# Altium PCB Mach in giua ben trai.PcbDoc
Units mm, origin at the board's own origin, x right, y up, seen from the top; angles counter-clockwise.
Board outline 128.65 x 91.19 mm, 2 copper layers (Top Layer, Bottom Layer); 61 components, 49 nets, 167 pads, 49 vias.
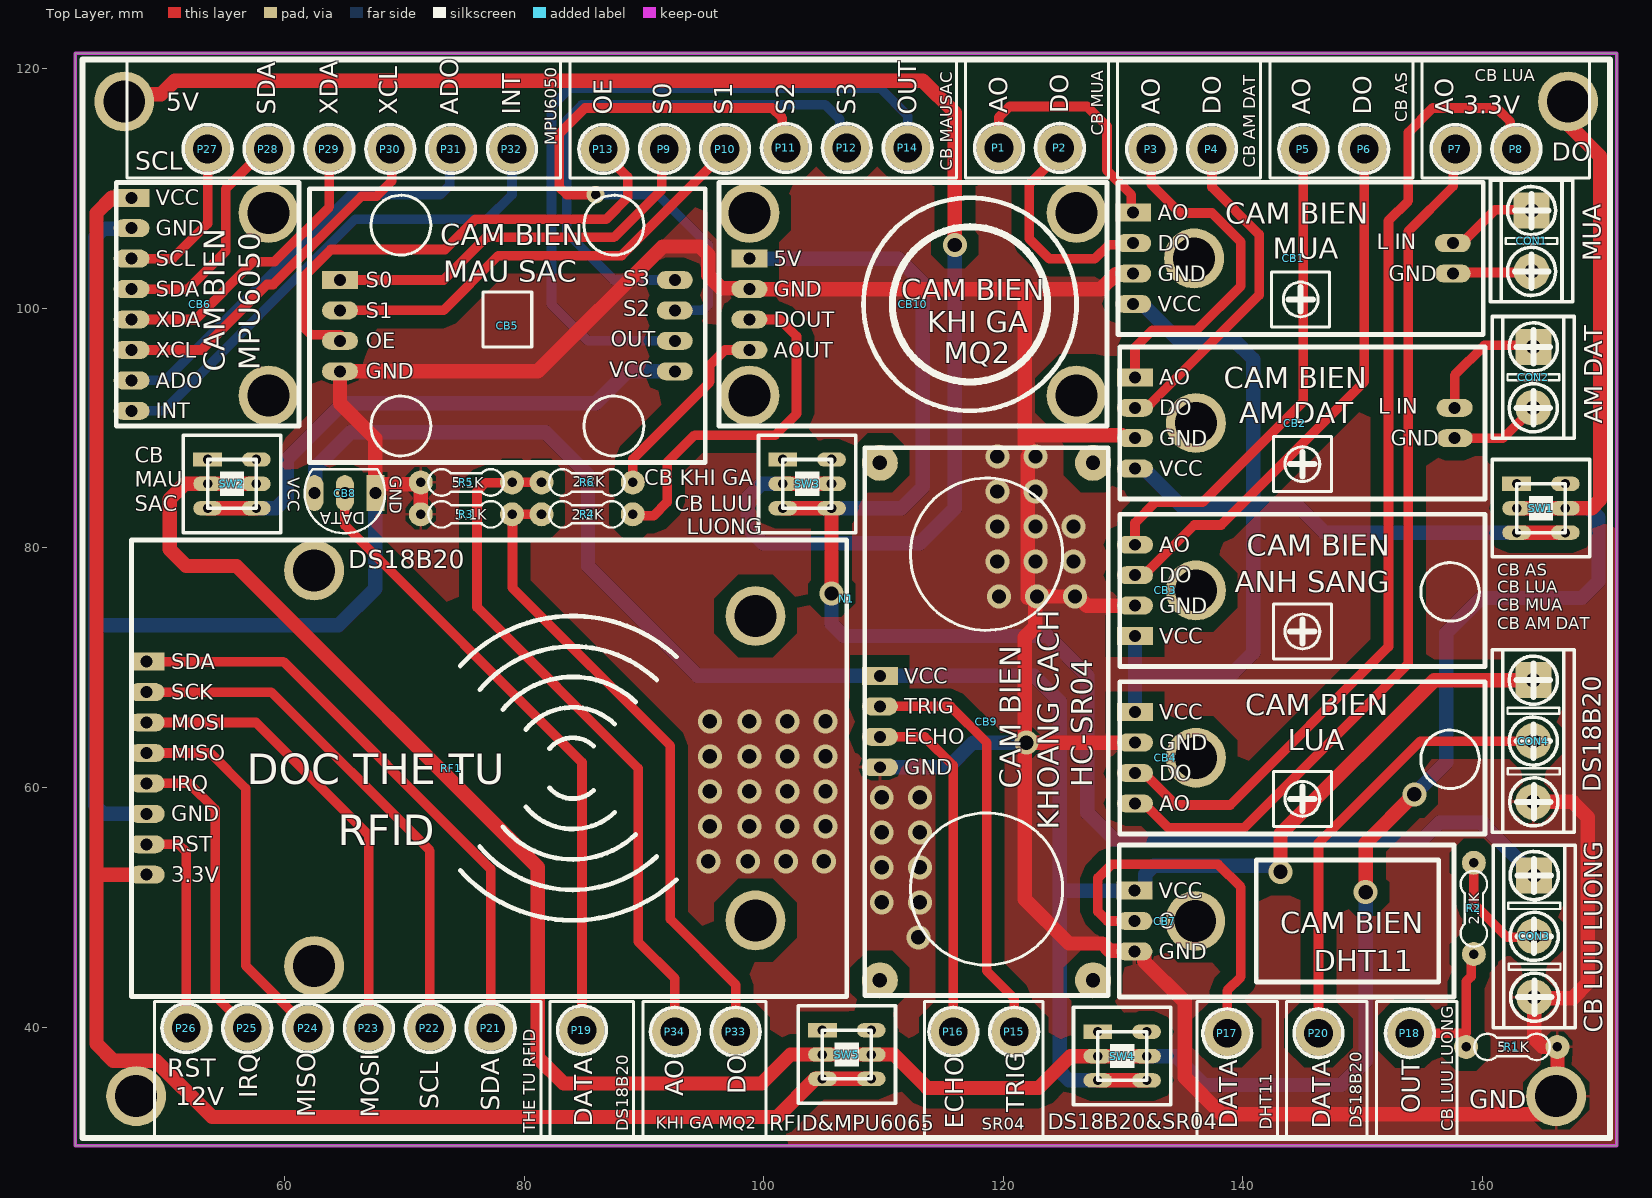
[diagram p0: Top Layer view]
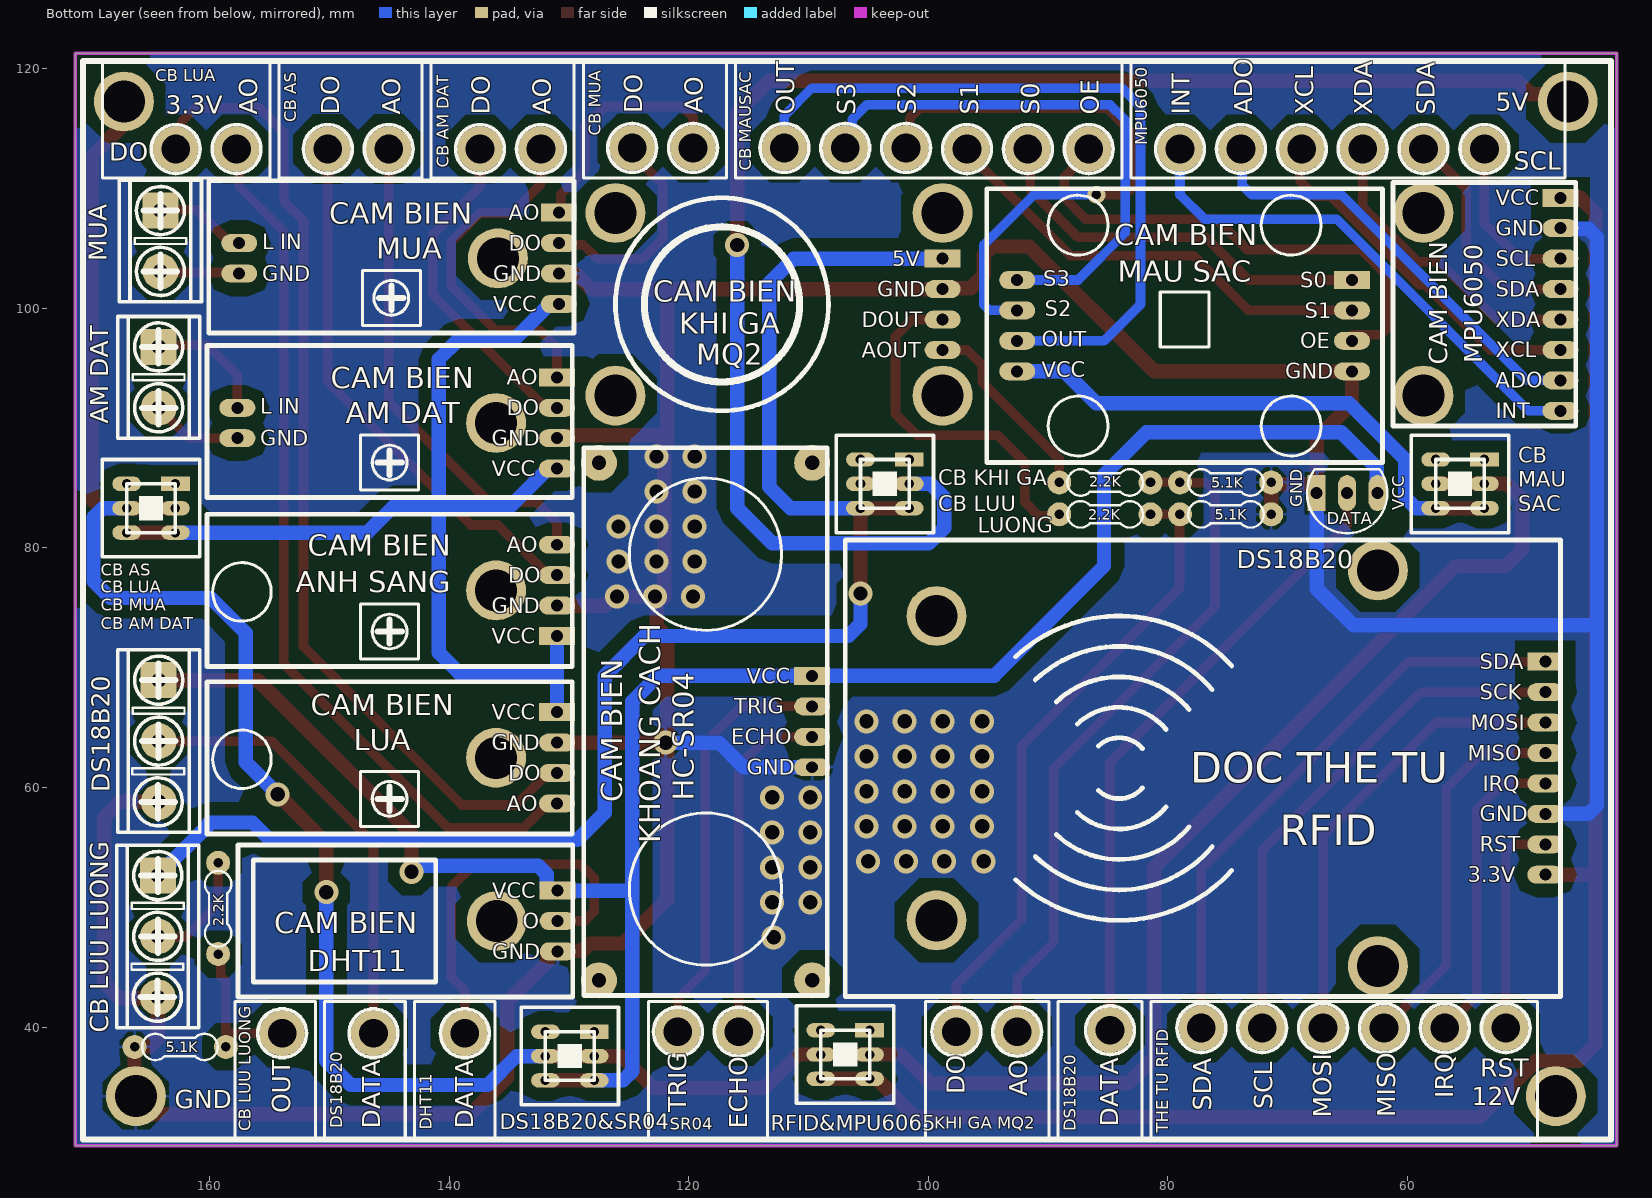
[diagram p1: Bottom Layer view, seen from below]

## Layer stack, top to bottom
Top Solder: solder mask 0.0102, Solder Resist, Dk 3.5
Top Layer: signal copper 0.0356
Dielectric 1: dielectric 0.32, FR-4, Dk 4.8
Bottom Layer: signal copper 0.0356
Bottom Solder: solder mask 0.0102, Solder Resist, Dk 3.5

## Board outline
171.196,121.285 42.545,121.285 42.545,30.099 171.196,30.099

## Design rules (kind name [scope] priority, off if disabled: settings)
Clearance [All] p1: gap=1 ignorepadtopadclearanceinfootprint=FALSE
PolygonConnect [All] p1: connectstyle=Relief reliefconductorwidth=0.254 reliefentries=4 polygonreliefangle="90 Angle" airgapwidth=0.254
RoutingVias [All] p1: holewidth=0.8 width=1.5 viastyle="Through Hole" minholewidth=0.5 minwidth=1 maxholewidth=1.2 maxwidth=2
SolderMaskExpansion [All] p1: expansion=0.102 istentingtop=FALSE
Width [All] p1: maxlimit=1.2 minlimit=0.5 preferedwidth=0.8
30 further rules are at their usual default settings.

## Components (designator, comment, footprint, x,y, rotation, side; value= is the part's Value field where it differs from the comment)
CB1 "CB_MUA" CB_MUA 144.684,103.786 r0 top
CB2 "CB_DAT" CB_MUA 144.832,90.043 r0 top
CB3 "CB ANH SANG" "CB ANH SANG" 144.719,76.599 r0 top
CB4 "CB_LUA" CB_LUA 145.086,62.484 r0 top
CB5 "CB_MAUSAC" CB_MAUSAC 78.613,99.187 r0 top
CB6 "CB_MPU6050" CB_MPU6050 53.594,100.33 r0 top
CB7 "CB_DHT11" CB_DHT11 144.274,48.61 r0 top
CB8 "DS18B20" DS18B20 65.047,84.577 r270 top
CB9 "CB_SR04" CB_SR04 118.465,65.125 r0 top
CB10 "MQ2" MQ2 117.221,100.584 r0 top
CON1 "CON2" CON2 164.084,105.614 r0 top
CON2 "CON2" CON2 164.233,94.234 r0 top
CON3 "CB_LUULUONG" CON3 164.302,47.454 r0 top
CON4 "DS18B20_NUOC" CON3 164.233,63.754 r0 top
N1 "NGUON_2" NGUON_2 108.585,77.343 r0 top
P1 "PIN" PIN1 119.634,113.384 r180 top
P2 "PIN" PIN1 124.714,113.384 r180 top
P3 "PIN" PIN1 132.334,113.284 r180 top
P4 "PIN" PIN1 137.414,113.284 r180 top
P5 "PIN" PIN1 145.034,113.284 r180 top
P6 "PIN" PIN1 150.114,113.284 r180 top
P7 "PIN" PIN1 157.734,113.284 r180 top
P8 "PIN" PIN1 162.814,113.284 r180 top
P9 "PIN" PIN1 91.694,113.284 r180 top
P10 "PIN" PIN1 96.774,113.284 r180 top
P11 "PIN" PIN1 101.854,113.384 r180 top
P12 "PIN" PIN1 106.934,113.384 r180 top
P13 "PIN" PIN1 86.614,113.284 r180 top
P14 "PIN" PIN1 112.014,113.384 r180 top
P15 "PIN" PIN1 120.904,39.624 r180 top
P16 "PIN" PIN1 115.824,39.624 r180 top
P17 "PIN" PIN1 138.684,39.497 r180 top
P18 "PIN" PIN1 153.924,39.497 r180 top
P19 "PIN" PIN1 84.836,39.751 r180 top
P20 "PIN" PIN1 146.304,39.497 r180 top
P21 "PIN" PIN1 77.216,39.927 r180 top
P22 "PIN" PIN1 72.136,39.927 r180 top
P23 "PIN" PIN1 67.056,39.927 r180 top
P24 "PIN" PIN1 61.976,39.927 r180 top
P25 "PIN" PIN1 56.896,39.927 r180 top
P26 "PIN" PIN1 51.816,39.927 r180 top
P27 "PIN" PIN1 53.594,113.284 r180 top
P28 "PIN" PIN1 58.674,113.284 r180 top
P29 "PIN" PIN1 63.754,113.284 r180 top
P30 "PIN" PIN1 68.834,113.284 r180 top
P31 "PIN" PIN1 73.914,113.284 r180 top
P32 "PIN" PIN1 78.994,113.284 r180 top
P33 "PIN" PIN1 97.663,39.624 r180 top
P34 "PIN" PIN1 92.583,39.624 r180 top
R1 "5.1K" DIENTRO 162.56,38.354 r270 top
R2 "2.2K" DIENTRO 159.266,49.784 r180 top
R3 "5.1K" DIENTRO 75.064,82.804 r90 top
R4 "2.2K" DIENTRO 85.142,82.804 r90 top
R5 "5.1K" DIENTRO 75.064,85.464 r90 top
R6 "2.2K" DIENTRO 85.142,85.464 r90 top
RF1 "THE TU RFID" "THE TU RFID" 76.962,61.363 r0 top
SW1 "CONGTAC6CHAN" CONGTAC6CHAN 164.868,83.312 r0 top
SW2 "CONGTAC6CHAN" CONGTAC6CHAN 55.626,85.344 r0 top
SW3 "CONGTAC6CHAN" CONGTAC6CHAN 103.632,85.344 r0 top
SW4 "CONGTAC6CHAN" CONGTAC6CHAN 129.921,37.592 r0 top
SW5 "CONGTAC6CHAN" CONGTAC6CHAN 106.934,37.719 r0 top

## Footprints (in the part's own frame and the unit in brackets; to place one, negate y for a bottom-side part, rotate by r counter-clockwise, add the part's x,y. Pads: shape width x height; smd on the part's side, far side on the other; paste and mask are expansions set on the pad)
"CB ANH SANG" [mm]
  round 5 hole 3.5: 0(-8.649,-0.145)
  rect 3x1.5 hole 1: 1(-13.729,-3.955)
  oval 3x1.5 hole 1: 2(-13.729,-1.415) 3(-13.729,1.125) 4(-13.729,3.665)
  silkscreen extent -15,-6.5 15.48,6.2
CB_DHT11 [mm]
  round 5 hole 3.5: 0(-8.255,0.254)
  rect 3x1.5 hole 1: 1(-13.335,2.794)
  oval 3x1.5 hole 1: 2(-13.335,0.254) 3(-13.335,-2.286)
  silkscreen extent -14.6,-6.1 13.33,6.6
CB_LUA [mm]
  round 5 hole 3.5: 0(-9.017,0)
  rect 3x1.5 hole 1: 1(-14.097,3.81)
  oval 3x1.5 hole 1: 2(-14.097,1.27) 3(-14.097,-1.27) 4(-14.097,-3.81)
  silkscreen extent -15.37,-6.35 15.11,6.35
CB_MAUSAC [mm]
  rect 3x1.5 hole 1: 1(-13.97,3.175)
  oval 3x1.5 hole 1: 2(-13.97,0.635) 3(-13.97,-1.905) 4(-13.97,-4.445) 5(13.97,-4.445) 6(13.97,-1.905) 7(13.97,0.635) 8(13.97,3.175)
  silkscreen extent -16.51,-12.06 16.51,10.79
CB_MPU6050 [mm]
  round 5 hole 3.5: 0(5.08,-7.62) 0(5.08,7.62)
  rect 3x1.5 hole 1: 1(-6.35,8.89)
  oval 3x1.5 hole 1: 2(-6.35,6.35) 3(-6.35,3.81) 4(-6.35,1.27) 5(-6.35,-1.27) 6(-6.35,-3.81) 7(-6.35,-6.35) 8(-6.35,-8.89)
  silkscreen extent -7.62,-10.16 7.62,10.16
CB_MUA [mm]
  round 5 hole 3.5: 0(-8.763,0.381)
  rect 3x1.5 hole 1: 1(-13.843,4.191)
  oval 3x1.5 hole 1: 2(-13.843,1.651) 3(-13.843,-0.889) 4(-13.843,-3.429) 5(12.827,1.651) 6(12.827,-0.889)
  silkscreen extent -15.11,-5.97 15.37,6.73
CB_SR04 [mm]
  round 3 hole 1.2: 0(-8.763,-21.209) 0(-8.763,21.971) 0(9.017,-21.209) 0(9.017,21.971)
  rect 3x1.5 hole 1: 1(-8.763,4.191)
  oval 3x1.5 hole 1: 2(-8.763,1.651) 3(-8.763,-0.889) 4(-8.763,-3.429)
  silkscreen extent -10.03,-22.48 10.29,23.24
CON2 [mm]
  rect 3x3 hole 1.2: 1(0,2.54)
  round 3 hole 1.2: 2(0,-2.54)
  silkscreen extent -3.43,-5.08 3.43,5.08
CON3 [mm]
  rect 3x3 hole 1.2: 1(0,5.207)
  round 3 hole 1.2: 2(0,0.127) 3(0,-4.953)
  silkscreen extent -3.43,-7.49 3.43,7.75
CONGTAC6CHAN [mm]
  rect 2.4x1.2 hole 0.8: 1(-2.032,2.032)
  oval 2.4x1.2 hole 0.8: 2(-2.032,0) 3(-2.032,-2.032) 4(2.032,2.032) 5(2.032,0) 6(2.032,-2.032)
  silkscreen extent -4.06,-4.06 4.06,4.06
DIENTRO [mm]
  round 2 hole 0.8: 1(0,3.683) 2(0,-3.937)
  silkscreen extent -1.1,-3.26 1.1,3.05
DS18B20 [mm]
  rect 3x1.5 hole 1: 1(0,2.54)
  oval 3x1.5 hole 1: 2(0,0) 3(0,-2.54)
  silkscreen extent -1.99,-3.35 3.35,3.35
MQ2 [mm]
  round 5 hole 3.5: 0(-18.415,-7.874) 0(-18.415,7.366) 0(8.89,-7.874) 0(8.89,7.366)
  rect 3x1.5 hole 1: 1(-18.415,3.556)
  oval 3x1.5 hole 1: 2(-18.415,1.016) 3(-18.415,-1.524) 4(-18.415,-4.064)
  silkscreen extent -20.95,-10.41 11.43,9.91
NGUON_2 [mm]
  round 5 hole 3.5: 1(-61.95,39.91) 2(58.55,39.91) 3(-60.95,-43.09) 4(57.55,-43.09)
  silkscreen extent -65.45,-46.59 62.05,43.41
PIN1 [mm]
  round 3.8 hole 2.4: 1(0,0)
  silkscreen extent -2.03,-2.03 2.03,2.03
"THE TU RFID" [mm]
  round 5 hole 3.5: 0(-14.478,-16.256) 0(-14.478,16.764) 0(22.352,-12.446) 0(22.352,12.954)
  rect 3x1.5 hole 1: 1(-28.448,9.144)
  oval 3x1.5 hole 1: 2(-28.448,6.604) 3(-28.448,4.064) 4(-28.448,1.524) 5(-28.448,-1.016) 6(-28.448,-3.556) 7(-28.448,-6.096) 8(-28.448,-8.636)
  silkscreen extent -29.72,-18.8 29.97,19.3

## Part data
CON3 CON4: library part CON3
R1 R2 R3 R4 R5 R6: library part DIENTRO

## Via types
v1: diameter 2, hole 1.2, Top Layer to Bottom Layer, tented both sides, 48 vias
v2: diameter 1.5, hole 0.8, Top Layer to Bottom Layer, tented both sides, 1 vias

## Nets (pads, with @x,y where several pads share a name; then routed paths per layer and width w, separated by ;. In a path a pad name is that pad's centre, name@x,y a point inside that pad or via, vN(x,y) a via of type N, cw(c..) or ccw(c..) an arc to the next point about the centre after c; other vN are vias at no path point)
1AO: CB1.1 P1.1 | length 20.8
  Top Layer w0.8: P1.1 119.634,115.951 120.523,116.84 127,116.84 128.651,115.189 128.651,111.506 130.683,109.474 130.683,108.135 CB1.1
1DO: CB1.2 P2.1 | length 18.5
  Top Layer w0.8: P2.1 124.714,112.903 122.174,110.363 122.174,105.791 123.825,104.14 127.635,104.14 128.798,105.303 130.707,105.303 CB1.2
1SCL: P22.1 RF1.2 | length 43.9
  Top Layer w0.8: RF1.2 58.906,67.967 72.136,54.737 P22.1
1SDA: P21.1 RF1.1 | length 49.2
  Top Layer w0.8: RF1.1 59.922,70.507 77.216,53.213 P21.1
2AO: CB2.1 P3.1 | length 29.5
  Top Layer w0.8: CB2.1 130.989,96.722 132.439,98.171 136.144,98.171 139.827,101.854 139.827,105.537 137.414,107.95 134.747,107.95 132.334,110.363 P3.1
2DO: CB2.2 P4.1 | length 28.1
  Top Layer w0.8: CB2.2 131.929,91.694 132.279,92.044 132.303,92.044 141.351,101.092 141.351,106.172 137.414,110.109 P4.1
2SCL: CB6.3 P27.1 | length 13.8
  Top Layer w0.8: CB6.3 50.673,104.14 53.594,107.061 P27.1
2SDA: CB6.4 P28.1 | length 19.3
  Top Layer w0.8: CB6.4 51.943,101.6 55.118,104.775 55.118,109.982 58.42,113.284 P28.1
3.3V: N1.2 SW1.2 SW1.5 SW2.2 SW2.5 SW4.2 SW4.5 SW5.2 SW5.5 | length 246
  Top Layer w1.2: SW2.5 SW2.2 51.689,85.344 50.419,84.074 50.419,79.883 51.816,78.486 56.007,78.486 81.153,53.34 81.153,37.465 83.312,35.306 99.822,35.306 102.235,37.719 SW5.2 SW5.5 110.871,37.719 113.665,34.925 122.936,34.925 125.603,37.592 SW4.2 SW4.5 ; v1(150.241,51.267) 150.241,55.372 v1(154.305,59.436) ; SW1.2 169.096,83.312 169.799,84.015 169.799,112.693 167.262,115.23 N1.2@167.262,115.729
  Bottom Layer w1.2: SW4.5 134.366,37.592 136.779,35.179 148.209,35.179 150.241,37.211 v1(150.241,51.267) ; v1(154.305,59.436) 156.972,62.103 156.972,72.898 159.893,75.819 168.275,75.819 169.672,77.216 169.672,82.55 168.91,83.312 SW1.5
3.3V1: CB1.4 CB2.4 CB3.1 CB4.1 SW1.3 SW1.6 | length 91.5
  Top Layer w1.2: SW1.3 SW1.6
  Bottom Layer w1.2: CB1.4 131.591,100.357 134.539,97.409 139.192,97.409 140.843,95.758 140.843,83.502 ; CB4.1 130.989,69.596 ; CB3.1 130.989,69.596 ; CB2.4 131.739,86.614 134.914,83.439 140.779,83.439 140.843,83.502 ; SW1.3 146.812,81.28 144.589,83.502 140.843,83.502 ; 130.989,69.596 139.192,69.596 140.843,71.247 140.843,83.502
3.3V2: CB5.5 SW2.3 SW2.6 | length 45.6
  Top Layer w1.2: SW2.3 SW2.6
  Bottom Layer w1.2: SW2.6 59.309,83.312 60.198,84.201 60.198,87.376 64.897,92.075 85.979,92.075 88.646,94.742 CB5.5
3.3V3: CB7.1 CB8.3 CB9.1 CON4.1 SW4.3 SW4.6 | length 167.1
  Top Layer w1.2: SW4.3 SW4.6 ; v1@143.129,53.34 143.129,56.134 155.956,68.961 CON4.1
  Bottom Layer w1.2: CB8.3 62.565,84.634 62.565,86.695 65.532,89.662 81.788,89.662 85.344,86.106 85.344,78.486 94.514,69.316 CB9.1 122.581,69.316 124.714,67.183 124.714,51.404 ; SW4.3 125.476,35.56 124.714,36.322 124.714,51.404 ; v1(143.129,52.959) 142.913,52.959 142.405,53.467 132.542,53.467 131.839,52.764 131.839,51.554 131.689,51.404 124.714,51.404
3.3V4: CB6.1 RF1.8 SW5.3 SW5.6 | length 145.5
  Top Layer w1.2: CB6.1 45.593,109.22 44.323,107.95 44.323,52.727 ; RF1.8 44.323,52.727 ; SW5.6 SW5.3 104.302,35.687 101.127,32.512 53.975,32.512 49.276,37.211 45.72,37.211 44.323,38.608 44.323,52.727
3AO: CB3.4 P5.1 | length 41.1
  Top Layer w0.8: CB3.4 130.989,82.094 132.715,83.82 136.652,83.82 145.034,92.202 P5.1
3DO: CB3.3 P6.1 | length 45.2
  Top Layer w0.8: CB3.3 131.739,77.724 135.93,81.915 138.176,81.915 150.114,93.853 P6.1
4AO: CB4.4 P7.1 | length 73.9
  Top Layer w0.8: CB4.4 131.739,58.674 133.771,56.642 140.081,56.642 153.797,70.358 153.797,106.436 157.545,110.184 157.545,113.095 P7.1
4DO: CB4.3 P8.1 | length 83.7
  Top Layer w0.8: CB4.3 131.739,61.214 134.406,58.547 138.938,58.547 152.146,71.755 152.146,107.315 153.797,108.966 153.797,114.681 155.829,116.713 161.163,116.713 162.311,115.565 162.311,113.787 P8.1
5V: N1.1 SW3.2 SW3.5 | length 134.4
  Top Layer w1.2: N1.1@46.762,115.729 47.573,115.729 47.573,117.045 48.39,117.862 49.707,117.862 50.843,118.999 113.284,118.999 115.951,116.332 v1(115.951,105.283) ; SW3.2 SW3.5
  Bottom Layer w1.2: SW3.2 99.822,85.344 98.679,84.201 98.679,81.661 99.949,80.391 113.03,80.391 115.951,83.312 v1(115.951,105.283)
5V1: CB10.1 CON3.1 SW3.3 SW3.6 | length 129.7
  Top Layer w1.2: SW3.3 SW3.6 v1(105.664,76.2)
  Bottom Layer w1.2: CB10.1 111.252,104.14 113.284,102.108 113.284,85.09 111.506,83.312 SW3.6 ; v1(105.664,76.2) 105.664,73.66 106.68,72.644 123.698,72.644 127,69.342 127,57.912 129.286,55.626 154.94,55.626 156.396,57.082 160.02,57.082 160.02,56.943 CON3.1
ADO: CB6.7 P31.1 | length 36.4
  Bottom Layer w0.8: CB6.7 50.038,93.98 65.532,109.474 73.025,109.474 73.787,110.236 73.787,113.157 P31.1
AOUT: CB10.4 R6.2 | length 16.3
  Top Layer w0.8: R6.2 89.079,87.428 95.504,93.853 95.504,95.25 96.774,96.52 CB10.4
AOUT1: P34.1 R5.2 R6.1 | length 57.6
  Top Layer w0.8: R6.1 R5.2 78.975,85.437 76.801,85.437 76.073,84.709 76.073,75.057 89.535,61.595 89.535,47.117 92.583,44.069 P34.1
DATA1: CB8.2 P19.1 | length 53
  Top Layer w0.8: CB8.2 65.047,81.892 84.836,62.103 P19.1
DATA2: CON4.2 P20.1 | length 37.3
  Top Layer w0.8: P20.1 146.304,55.372 154.813,63.881 CON4.2
DOUT: CB10.3 R4.2 | length 30.2
  Top Layer w0.8: R4.2 89.206,82.677 90.805,82.677 91.948,83.82 91.948,87.122 94.234,89.408 100.965,89.408 102.743,91.186 102.743,97.663 101.346,99.06 CB10.3
DOUT1: P33.1 R3.2 R4.1 | length 53.4
  Top Layer w0.8: R4.1 R3.2 79.035,82.77 79.035,76.667 92.202,63.5 92.202,49.022 97.663,43.561 P33.1
ECHO: CB9.3 P16.1 | length 29.3
  Top Layer w0.8: CB9.3 113.437,64.236 115.824,61.849 P16.1
GND: CB1.3 CB2.3 CB3.2 CB4.2 CB5.4 CB6.2 CB7.3 CB8.1 CB9.4 CB10.2 CON3.3 CON4.3 N1.4 R1.1 R3.1 R5.1 RF1.6 | length 363
  Top Layer w1.2: CB8.1 CB8.1@67.587,85.161 ; R3.1 R5.1 71.228,85.311 67.737,85.311 CB8.1@67.587,85.161 ; v1@122.047,75.819 v1@122.047,87.63 ; v1(122.682,87.63) 122.682,87.846 121.793,88.735 121.793,89.408 ; v1@122.809,75.692 123.063,75.946 125.73,75.946 v1@125.984,75.692 ; v1(122.809,75.946) 122.656,75.793 122.656,73.409 121.793,72.546 v1@121.793,63.627 ; v1(125.984,75.946) 126.2,75.946 126.962,75.184 CB3.2 ; CB1.3 130.783,102.839 129.382,102.839 128.143,101.6 121.793,101.6 ; CB4.2 v1(121.92,63.754) v1@121.793,63.627 ; CB2.3 130.158,89.154 129.904,89.408 121.793,89.408 ; CON4.3 167.513,58.801 168.783,57.531 168.783,43.688 167.513,42.418 164.385,42.418 CON3.3 164.302,39.057 165.005,38.354 R1.1 166.252,38.345 166.252,32.738 166.262,32.729 138.213,32.729 135.128,35.814 135.128,42.136 131.747,45.517 131.747,46.186 131.608,46.324 CB7.3 130.882,46.382 128.878,46.382 128.27,46.99 125.476,46.99 121.793,50.673 v1@121.793,63.627 ; CB8.1@67.587,85.161 67.587,89.131 64.643,92.075 CB5.4 81.153,94.742 91.567,105.156 94.674,105.156 95.377,104.453 95.377,102.743 96.463,101.657 98.749,101.657 CB10.2 121.793,101.6 ; 121.793,89.408 121.793,101.6
  Bottom Layer w1.2: CB6.2 47.187,106.623 44.899,106.623 44.196,105.92 44.196,73.279 ; RF1.6 44.899,57.807 44.196,58.51 44.196,73.279 ; CB8.1 67.587,76.604 64.516,73.533 44.45,73.533 44.196,73.279 ; CB9.4 115.417,61.696 117.475,63.754 v1(121.92,63.754)
  other v1: 112.903,47.498 109.855,50.419 113.03,50.419 109.855,53.34 113.03,53.34 95.377,53.848 98.679,53.848 101.854,53.848 105.029,53.848 109.855,56.261 113.03,56.261 95.504,56.769 98.806,56.769 101.981,56.769 105.156,56.769 109.855,59.182 113.03,59.182 95.504,59.69 98.806,59.69 101.981,59.69 105.156,59.69 95.504,62.611 98.806,62.611 101.981,62.611 105.156,62.611 95.504,65.532 98.806,65.532 101.981,65.532 105.156,65.532 119.634,75.946 119.507,78.867 122.682,78.867 125.857,78.867 119.507,81.788 122.682,81.788 125.857,81.788 119.507,84.709 122.682,84.709 119.507,87.63
IN: CB6.8 P32.1 | length 43
  Bottom Layer w0.8: CB6.8 49.911,91.44 65.913,107.442 76.962,107.442 78.994,109.474 P32.1
IRQ: P25.1 RF1.5 | length 26
  Top Layer w0.8: RF1.5 52.048,60.347 54.229,58.166 54.229,42.594 P25.1
MISO: P24.1 RF1.4 | length 31.6
  Top Layer w0.8: RF1.4 53.826,62.887 56.769,59.944 56.769,45.134 P24.1
MOSI: P23.1 RF1.3 | length 38.5
  Top Layer w0.8: RF1.3 57.636,65.427 67.056,56.007 P23.1
NetCB1_5: CB1.5 CON1.1 | length 7.7
  Top Layer w0.8: CB1.5 158.261,105.437 161.028,108.204 164.034,108.204 CON1.1
NetCB1_6: CB1.6 CON1.2 | length 6.6
  Top Layer w0.8: CB1.6 157.599,102.985 163.995,102.985 CON1.2
NetCB2_5: CB2.5 CON2.1 | length 10.4
  Top Layer w0.8: CB2.5 157.659,94.413 160.147,96.901 164.106,96.901 CON2.1
NetCB2_6: CB2.6 CON2.2 | length 7.6
  Top Layer w0.8: CB2.6 161.693,89.154 CON2.2
OE: CB5.3 P13.1 | length 42.3
  Top Layer w0.8: CB5.3@64.643,97.79 62.23,97.79 61.468,98.552 61.468,102.489 63.881,104.902 73.406,104.902 75.946,107.442 86.868,107.442 88.646,109.22 88.646,110.97 86.614,113.002 P13.1
OUT: CON3.2 R2.2 | length 9.7
  Top Layer w0.8: R2.2 159.266,50.284 162.052,47.498 164.219,47.498 CON3.2
OUT1: CB5.6 P14.1 | length 62
  Bottom Layer w0.8: CB5.6 85.344,97.282 82.296,100.33 82.296,116.84 83.82,118.364 109.728,118.364 112.014,116.078 P14.1
OUT2: CB7.2 P17.1 | length 32
  Top Layer w0.8: CB7.2 128.682,48.864 127.889,49.657 127.889,52.451 129.032,53.594 137.922,53.594 139.827,51.689 139.827,44.196 138.684,43.053 P17.1
OUT4: P18.1 R1.2 R2.1 | length 11.6
  Top Layer w0.8: P18.1 158.623,39.497 158.623,43.815 159.037,44.229 159.037,45.871 R2.1
RESET: P26.1 RF1.7 | length 18.3
  Top Layer w0.8: RF1.7 51.159,55.267 51.816,54.61 P26.1
S0: CB5.1 P9.1 | length 33.4
  Top Layer w0.8: CB5.1 73.279,102.362 76.835,105.918 87.503,105.918 91.508,109.923 91.508,113.098 P9.1
S1: CB5.2 P10.1 | length 37.9
  Top Layer w0.8: CB5.2 73.279,99.822 77.851,104.394 88.138,104.394 96.774,113.03 P10.1
S2: CB5.7 P11.1 | length 49.3
  Top Layer w0.8: v2(85.979,109.474) 83.566,109.474 82.931,110.109 82.931,114.554 85.09,116.713 100.711,116.713 101.555,115.869 101.555,113.683 P11.1
  Bottom Layer w0.8: v2(85.979,109.474) 91.186,109.474 95.377,105.283 95.377,100.291 94.908,99.822 CB5.7
S3: CB5.8 P12.1 | length 46.5
  Bottom Layer w0.8: CB5.8 87.503,102.362 83.566,106.299 83.566,115.697 84.836,116.967 105.156,116.967 106.36,115.763 106.36,113.958 P12.1
TRIG: CB9.2 P15.1 | length 35.2
  Top Layer w0.8: CB9.2 115.596,66.776 118.618,63.754 118.618,44.704 120.904,42.418 P15.1
XCL: CB6.6 P30.1 | length 30.3
  Top Layer w0.8: CB6.6 53.086,96.52 58.547,101.981 59.055,101.981 66.421,109.347 67.691,109.347 68.961,110.617 68.961,113.157 P30.1
XDA: CB6.5 P29.1 | length 25.2
  Top Layer w0.8: CB6.5 52.578,99.06 57.404,103.886 59.182,103.886 63.754,108.458 P29.1
pads on no net: CB1.0 CB2.0 CB3.0 CB4.0 CB6.0 CB7.0 CB9.0 CB10.0 N1.3 RF1.0 SW1.1 SW1.4 SW2.1 SW2.4 SW3.1 SW3.4 SW4.1 SW4.4 SW5.1 SW5.4

## Polygon pours and split planes (outlines as drawn)
GND on Top Layer "Top Poly" (solid, remove dead copper, pour order 0): 42.545,121.285 171.196,121.285 171.196,30.099 42.545,30.099
GND on Bottom Layer "Bottom Poly" (solid, remove dead copper, pour order 1): 42.545,121.285 171.196,121.285 171.196,30.099 42.545,30.099

## Keep-outs
Keep-Out Layer:
  the board outline again, w0.3

## Silkscreen, mask and mechanical layers (free items; w line width, h text height)
Top Overlay:
  lines w0.254: 46.863,110.871 83.058,110.871 83.058,120.777 46.863,120.777 46.863,110.871 ; 49.149,30.734 81.407,30.734 81.407,42.164 49.149,42.164 49.149,30.734 ; 82.169,30.734 89.154,30.734 89.154,42.164 82.169,42.164 82.169,30.734 ; 83.82,110.871 116.078,110.871 116.078,120.777 83.82,120.777 83.82,110.871 ; 89.916,30.734 100.203,30.734 100.203,42.164 89.916,42.164 89.916,30.734 ; 113.411,30.734 123.317,30.734 123.317,42.164 113.411,42.164 113.411,30.734 ; 116.84,110.871 128.778,110.871 128.778,120.777 116.84,120.777 116.84,110.871 ; 129.54,110.871 141.478,110.871 141.478,120.777 129.54,120.777 129.54,110.871 ; 136.144,30.734 142.875,30.734 142.875,42.164 136.144,42.164 136.144,30.734 ; 142.24,110.871 154.178,110.871 154.178,120.777 142.24,120.777 142.24,110.871 ; 143.637,30.734 150.368,30.734 150.368,42.164 143.637,42.164 143.637,30.734 ; 151.13,30.734 157.861,30.734 157.861,42.164 151.13,42.164 151.13,30.734 ; 154.94,110.871 168.91,110.871 168.91,120.777 154.94,120.777 154.94,110.871
  text "CB LUA" at 159.334,118.948 h1.02
  text "AO" at 120.345,116.256 h1.52 r90
  text "DO" at 125.425,116.256 h1.52 r90
  text "SDA" at 59.258,116.129 h1.52 r90
  text "XDA" at 64.465,116.129 h1.52 r90
  text "XCL" at 69.418,116.129 h1.52 r90
  text "ADO" at 74.498,116.129 h1.52 r90
  text "INT" at 79.705,116.129 h1.52 r90
  text "OE" at 87.325,116.129 h1.52 r90
  text "S0" at 92.278,116.129 h1.52 r90
  text "S1" at 97.358,116.129 h1.52 r90
  text "S2" at 102.565,116.129 h1.52 r90
  text "S3" at 107.645,116.129 h1.52 r90
  text "OUT" at 112.725,116.129 h1.52 r90
  text "AO" at 133.045,116.129 h1.52 r90
  text "DO" at 138.125,116.129 h1.52 r90
  text "AO" at 145.618,116.129 h1.52 r90
  text "DO" at 150.698,116.129 h1.52 r90
  text "AO" at 157.556,116.129 h1.52 r90
  text "CB AS" at 153.721,115.519 h1.02 r90
  text "CB MUA" at 128.321,114.376 h1.02 r90
  text "MPU6050" at 82.728,113.614 h1.02 r90
  text "DO" at 165.786,112.319 h1.52
  text "CB AM DAT" at 141.021,111.709 h1.02 r90
  text "SCL" at 47.549,111.557 h1.52
  text "CB MAUSAC" at 115.748,111.455 h1.02 r90
  text "CAM BIEN" at 138.532,107.036 h1.78
  text "CAM BIEN" at 73,105.258 h1.78
  text "MUA" at 142.469,104.115 h1.78
  text "MUA" at 169.875,103.937 h1.52 r90
  text "MAU SAC" at 73.254,102.21 h1.78
  text "CAM BIEN" at 111.481,100.686 h1.78
  text "KHI GA" at 113.64,98.019 h1.78
  text "MQ2" at 115.037,95.394 h1.78
  text "MPU6050" at 57.937,94.844 h1.78 r90
  text "CAM BIEN" at 55.016,94.717 h1.78 r90
  text "CAM BIEN" at 138.405,93.32 h1.78
  text "AM DAT" at 139.675,90.399 h1.78
  text "AM DAT" at 170.002,90.348 h1.52 r90
  text "CB" at 47.498,87.122 h1.27
  text "CB KHI GA" at 90.043,85.217 h1.27
  text "MAU" at 47.498,85.09 h1.27
  text "2.2K" at 84.084,85.097 h0.89
  text "5.1K" at 73.965,85.014 h0.89
  text "SAC" at 47.498,83.058 h1.27
  text "CB LUU" at 92.583,83.058 h1.27
  text "5.1K" at 74.219,82.347 h0.89
  text "2.2K" at 83.998,82.347 h0.89
  text "LUONG" at 93.599,81.153 h1.27
  text "CAM BIEN" at 140.31,79.35 h1.78
  text "DS18B20" at 65.329,78.283 h1.52
  text "CB AS" at 161.239,77.673 h1.02
  text "ANH SANG" at 139.294,76.302 h1.78
  text "CB LUA" at 161.239,76.276 h1.02
  text "CB MUA" at 161.239,74.752 h1.02
  text "CB AM DAT" at 161.239,73.228 h1.02
  text "CAM BIEN" at 140.183,66.015 h1.78
  text "LUA" at 143.739,63.094 h1.78
  text "DOC THE TU" at 56.845,60.274 h2.54
  text "HC-SR04" at 127.406,60.046 h1.78 r90
  text "CAM BIEN" at 121.437,59.919 h1.78 r90
  text "DS18B20" at 169.875,59.614 h1.52 r90
  text "KHOANG CACH" at 124.612,56.49 h1.78 r90
  text "RFID" at 64.465,55.194 h2.54
  text "2.2K" at 159.715,48.565 h0.89 r90
  text "CAM BIEN" at 143.104,47.854 h1.78
  text "DHT11" at 145.898,44.679 h1.78
  text "CB LUU LUONG" at 170.002,39.548 h1.52 r90
  text "5.1K" at 161.214,37.897 h0.89
  text "RST" at 50.216,35.865 h1.52
  text "DO" at 98.501,34.387 h1.52 r90
  text "AO" at 93.294,34.228 h1.52 r90
  text "IRQ" at 57.716,34.068 h1.52 r90
  text "SCL" at 72.847,33.161 h1.52 r90
  text "SDA" at 77.927,33.031 h1.52 r90
  text "TRIG" at 121.742,32.896 h1.52 r90
  text "OUT" at 154.762,32.809 h1.52 r90
  text "MISO" at 62.56,32.472 h1.52 r90
  text "MOSI" at 67.894,32.436 h1.52 r90
  text "DATA" at 85.674,31.674 h1.52 r90
  text "DS18B20" at 149.911,31.572 h1.02 r90
  text "KHI GA MQ2" at 91.008,31.542 h1.02
  text "ECHO" at 116.662,31.547 h1.52 r90
  text "DATA" at 139.522,31.547 h1.52 r90
  text "DATA" at 147.269,31.547 h1.52 r90
  text "DS18B20&SR04" at 123.698,31.496 h1.27
  text "SR04" at 118.186,31.445 h1.02
  text "DHT11" at 142.418,31.445 h1.02 r90
  text "RFID&MPU6065" at 100.457,31.369 h1.27
  text "DS18B20" at 88.697,31.318 h1.02 r90
  text "CB LUU LUONG" at 157.531,31.318 h1.02 r90
  text "THE TU RFID" at 80.95,31.191 h1.02 r90
Bottom Overlay:
  lines w0.254: 46.88,110.871 83.075,110.871 83.075,120.777 46.88,120.777 46.88,110.871 ; 49.166,30.734 81.424,30.734 81.424,42.164 49.166,42.164 49.166,30.734 ; 82.186,30.734 89.171,30.734 89.171,42.164 82.186,42.164 82.186,30.734 ; 83.837,110.871 116.095,110.871 116.095,120.777 83.837,120.777 83.837,110.871 ; 89.933,30.734 100.22,30.734 100.22,42.164 89.933,42.164 89.933,30.734 ; 113.428,30.734 123.334,30.734 123.334,42.164 113.428,42.164 113.428,30.734 ; 116.857,110.871 128.795,110.871 128.795,120.777 116.857,120.777 116.857,110.871 ; 129.557,110.871 141.495,110.871 141.495,120.777 129.557,120.777 129.557,110.871 ; 136.161,30.734 142.892,30.734 142.892,42.164 136.161,42.164 136.161,30.734 ; 142.257,110.871 154.195,110.871 154.195,120.777 142.257,120.777 142.257,110.871 ; 143.654,30.734 150.385,30.734 150.385,42.164 143.654,42.164 143.654,30.734 ; 151.147,30.734 157.878,30.734 157.878,42.164 151.147,42.164 151.147,30.734 ; 154.957,110.871 168.927,110.871 168.927,120.777 154.957,120.777 154.957,110.871
  text "CB LUA" at 164.516,118.948 h1.02
  text "AO" at 118.813,116.256 h1.52 r270
  text "DO" at 123.893,116.256 h1.52 r270
  text "SDA" at 57.726,116.129 h1.52 r270
  text "XDA" at 62.933,116.129 h1.52 r270
  text "XCL" at 67.886,116.129 h1.52 r270
  text "ADO" at 72.966,116.129 h1.52 r270
  text "INT" at 78.173,116.129 h1.52 r270
  text "OE" at 85.793,116.129 h1.52 r270
  text "S0" at 90.746,116.129 h1.52 r270
  text "S1" at 95.826,116.129 h1.52 r270
  text "S2" at 101.033,116.129 h1.52 r270
  text "S3" at 106.113,116.129 h1.52 r270
  text "OUT" at 111.193,116.129 h1.52 r270
  text "AO" at 131.513,116.129 h1.52 r270
  text "DO" at 136.593,116.129 h1.52 r270
  text "AO" at 144.086,116.129 h1.52 r270
  text "DO" at 149.166,116.129 h1.52 r270
  text "AO" at 156.024,116.129 h1.52 r270
  text "CB AS" at 152.73,115.519 h1.02 r270
  text "CB MUA" at 127.33,114.376 h1.02 r270
  text "MPU6050" at 81.737,113.614 h1.02 r270
  text "DO" at 168.351,112.319 h1.52
  text "CB AM DAT" at 140.03,111.709 h1.02 r270
  text "SCL" at 51.13,111.557 h1.52
  text "CB MAUSAC" at 114.757,111.455 h1.02 r270
  text "CAM BIEN" at 149.995,107.036 h1.78
  text "CAM BIEN" at 84.463,105.258 h1.78
  text "MUA" at 146.058,104.115 h1.78
  text "MUA" at 168.563,103.937 h1.52 r270
  text "MAU SAC" at 84.209,102.21 h1.78
  text "CAM BIEN" at 122.944,100.559 h1.78
  text "KHI GA" at 120.785,97.892 h1.78
  text "MPU6050" at 53.755,95.428 h1.52 r270
  text "CAM BIEN" at 56.676,95.301 h1.52 r270
  text "MQ2" at 119.388,95.267 h1.78
  text "CAM BIEN" at 149.868,93.32 h1.78
  text "AM DAT" at 148.598,90.399 h1.78
  text "AM DAT" at 168.436,90.348 h1.52 r270
  text "CB" at 50.783,87.122 h1.27
  text "CB KHI GA" at 99.155,85.217 h1.27
  text "MAU" at 50.783,85.09 h1.27
  text "2.2K" at 86.572,85.097 h0.89
  text "5.1K" at 76.371,85.014 h0.89
  text "SAC" at 50.783,83.058 h1.27
  text "CB LUU" at 99.155,83.058 h1.27
  text "5.1K" at 76.117,82.347 h0.89
  text "2.2K" at 86.658,82.347 h0.89
  text "LUONG" at 95.885,81.28 h1.27
  text "CAM BIEN" at 151.773,79.35 h1.78
  text "DS18B20" at 74.244,78.283 h1.52
  text "CB AS" at 169.071,77.673 h1.02
  text "ANH SANG" at 152.789,76.302 h1.78
  text "CB LUA" at 169.071,76.276 h1.02
  text "CB MUA" at 169.071,74.752 h1.02
  text "CB AM DAT" at 169.071,73.228 h1.02
  text "CAM BIEN" at 151.519,66.015 h1.78
  text "LUA" at 147.963,63.094 h1.78
  text "DOC THE TU" at 78.156,60.401 h2.54
  text "DS18B20" at 168.309,59.614 h1.52 r270
  text "HC-SR04" at 119.592,58.903 h1.78 r270
  text "CAM BIEN" at 125.561,58.776 h1.78 r270
  text "KHOANG CACH" at 122.386,55.347 h1.78 r270
  text "RFID" at 70.663,55.194 h2.54
  text "2.2K" at 158.801,48.438 h0.89 r270
  text "CAM BIEN" at 154.567,47.854 h1.78
  text "DHT11" at 151.773,44.679 h1.78
  text "CB LUU LUONG" at 168.453,39.548 h1.52 r270
  text "5.1K" at 163.652,37.897 h0.89
  text "RST" at 53.924,35.865 h1.52
  text "DO" at 96.969,34.387 h1.52 r270
  text "AO" at 91.762,34.228 h1.52 r270
  text "IRQ" at 56.203,34.087 h1.52 r270
  text "SCL" at 71.315,33.161 h1.52 r270
  text "SDA" at 76.395,33.031 h1.52 r270
  text "TRIG" at 120.21,32.896 h1.52 r270
  text "OUT" at 153.23,32.809 h1.52 r270
  text "MISO" at 61.028,32.472 h1.52 r270
  text "MOSI" at 66.362,32.436 h1.52 r270
  text "DATA" at 84.142,31.674 h1.52 r270
  text "DS18B20" at 148.92,31.572 h1.02 r270
  text "KHI GA MQ2" at 99.492,31.542 h1.02
  text "ECHO" at 115.13,31.547 h1.52 r270
  text "DATA" at 137.99,31.547 h1.52 r270
  text "DATA" at 145.737,31.547 h1.52 r270
  text "DS18B20&SR04" at 135.763,31.496 h1.27
  text "SR04" at 121.59,31.445 h1.02
  text "DHT11" at 141.427,31.445 h1.02 r270
  text "RFID&MPU6065" at 113.157,31.369 h1.27
  text "DS18B20" at 87.706,31.318 h1.02 r270
  text "CB LUU LUONG" at 156.54,31.318 h1.02 r270
  text "THE TU RFID" at 79.959,31.191 h1.02 r270

## Text inside footprints (layer, text, board x,y; h text height)
CB1: Bottom Overlay "L IN" at 155.606,104.929 h1.27; Bottom Overlay "GND" at 155.606,102.262 h1.27; Bottom Overlay "DO" at 135.032,104.802 h1.27; Bottom Overlay "GND" at 136.302,102.262 h1.27; Bottom Overlay "AO" at 135.032,107.342 h1.27; Bottom Overlay "VCC" at 136.302,99.722 h1.27; Top Overlay "L IN" at 151.161,104.929 h1.27; Top Overlay "GND" at 152.177,102.262 h1.27; Top Overlay "DO" at 132.873,104.802 h1.27; Top Overlay "GND" at 132.873,102.262 h1.27; Top Overlay "AO" at 132.873,107.342 h1.27; Top Overlay "VCC" at 132.873,99.722 h1.27
CB2: Bottom Overlay "L IN" at 155.754,91.186 h1.27; Bottom Overlay "GND" at 155.754,88.519 h1.27; Bottom Overlay "DO" at 135.18,91.059 h1.27; Bottom Overlay "GND" at 136.45,88.519 h1.27; Bottom Overlay "AO" at 135.18,93.599 h1.27; Bottom Overlay "VCC" at 136.45,85.979 h1.27; Top Overlay "L IN" at 151.309,91.186 h1.27; Top Overlay "GND" at 152.325,88.519 h1.27; Top Overlay "DO" at 133.021,91.059 h1.27; Top Overlay "GND" at 133.021,88.519 h1.27; Top Overlay "AO" at 133.021,93.599 h1.27; Top Overlay "VCC" at 133.021,85.979 h1.27
CB3: Bottom Overlay "GND" at 136.45,74.549 h1.27; Bottom Overlay "AO" at 135.18,79.629 h1.27; Bottom Overlay "DO" at 135.053,77.089 h1.27; Bottom Overlay "VCC" at 136.45,72.009 h1.27; Top Overlay "GND" at 133.021,74.549 h1.27; Top Overlay "AO" at 133.021,79.629 h1.27; Top Overlay "DO" at 133.021,77.089 h1.27; Top Overlay "VCC" at 133.021,72.009 h1.27
CB4: Bottom Overlay "GND" at 136.45,63.119 h1.27; Bottom Overlay "DO" at 135.053,60.579 h1.27; Bottom Overlay "VCC" at 136.45,65.659 h1.27; Bottom Overlay "AO" at 135.18,58.039 h1.27; Top Overlay "GND" at 133.021,63.119 h1.27; Top Overlay "DO" at 133.021,60.579 h1.27; Top Overlay "VCC" at 133.021,65.659 h1.27; Top Overlay "AO" at 133.021,58.039 h1.27
CB5: Bottom Overlay "S3" at 90.424,101.854 h1.27; Bottom Overlay "S2" at 90.297,99.314 h1.27; Bottom Overlay "OUT" at 90.551,96.774 h1.27; Bottom Overlay "VCC" at 90.551,94.234 h1.27; Bottom Overlay "GND" at 70.231,94.107 h1.27; Bottom Overlay "OE" at 68.961,96.647 h1.27; Bottom Overlay "S0" at 68.961,101.727 h1.27; Bottom Overlay "S1" at 68.58,99.187 h1.27; Top Overlay "S3" at 88.265,101.854 h1.27; Top Overlay "S2" at 88.265,99.314 h1.27; Top Overlay "OUT" at 87.249,96.774 h1.27; Top Overlay "VCC" at 87.122,94.234 h1.27; Top Overlay "GND" at 66.802,94.107 h1.27; Top Overlay "OE" at 66.802,96.647 h1.27; Top Overlay "S1" at 66.802,99.187 h1.27; Top Overlay "S0" at 66.802,101.727 h1.27
CB6: Bottom Overlay "GND" at 52.651,106.054 h1.27; Bottom Overlay "SCL" at 52.651,103.514 h1.27; Bottom Overlay "VCC" at 52.651,108.594 h1.27; Bottom Overlay "SDA" at 52.651,100.974 h1.27; Bottom Overlay "XDA" at 52.651,98.434 h1.27; Bottom Overlay "XCL" at 52.651,95.894 h1.27; Bottom Overlay "ADO" at 52.651,93.354 h1.27; Bottom Overlay "INT" at 52.651,90.814 h1.27; Top Overlay "GND" at 49.276,106.045 h1.27; Top Overlay "SCL" at 49.276,103.505 h1.27; Top Overlay "VCC" at 49.276,108.585 h1.27; Top Overlay "SDA" at 49.276,100.965 h1.27; Top Overlay "XDA" at 49.276,98.425 h1.27; Top Overlay "XCL" at 49.276,95.885 h1.27; Top Overlay "ADO" at 49.276,93.345 h1.27; Top Overlay "INT" at 49.276,90.805 h1.27
CB7: Bottom Overlay "VCC" at 136.4,50.769 h1.27; Bottom Overlay "O" at 133.86,48.229 h1.27; Bottom Overlay "GND" at 136.4,45.689 h1.27; Top Overlay "VCC" at 132.971,50.769 h1.27; Top Overlay "O" at 132.971,48.229 h1.27; Top Overlay "GND" at 132.971,45.689 h1.27
CB8: Bottom Overlay "DATA" at 66.749,81.986 h1.02; Bottom Overlay "VCC" at 60.297,83.129 h1.02 r270; Bottom Overlay "GND" at 68.806,83.383 h1.02 r270; Top Overlay "DATA" at 66.749,82.977 h1.02 r180; Top Overlay "VCC" at 60.297,85.898 h1.02 r270; Top Overlay "GND" at 68.806,86.025 h1.02 r270
CB9: Bottom Overlay "TRIG" at 116.179,66.141 h1.27; Bottom Overlay "VCC" at 115.163,68.681 h1.27; Bottom Overlay "ECHO" at 116.433,63.601 h1.27; Bottom Overlay "GND" at 115.163,61.061 h1.27; Top Overlay "TRIG" at 111.734,66.141 h1.27; Top Overlay "VCC" at 111.734,68.681 h1.27; Top Overlay "ECHO" at 111.734,63.601 h1.27; Top Overlay "GND" at 111.734,61.061 h1.27
CB10: Bottom Overlay "DOUT" at 105.537,98.425 h1.27; Bottom Overlay "AOUT" at 105.537,95.885 h1.27; Bottom Overlay "5V" at 102.997,103.505 h1.27; Bottom Overlay "GND" at 104.267,100.965 h1.27; Top Overlay "5V" at 100.838,103.505 h1.27; Top Overlay "DOUT" at 100.838,98.425 h1.27; Top Overlay "AOUT" at 100.838,95.885 h1.27; Top Overlay "GND" at 100.838,100.965 h1.27
N1: Bottom Overlay "12V" at 54.635,33.503 h1.52; Bottom Overlay "5V" at 52.635,116.503 h1.52; Bottom Overlay "GND" at 162.885,33.253 h1.52; Bottom Overlay "3.3V" at 163.635,116.253 h1.52; Top Overlay "GND" at 158.885,33.253 h1.52; Top Overlay "12V" at 50.885,33.503 h1.52; Top Overlay "3.3V" at 158.385,116.253 h1.52; Top Overlay "5V" at 50.135,116.503 h1.52
RF1: Bottom Overlay "GND" at 53.975,57.172 h1.27; Bottom Overlay "SDA" at 53.975,69.872 h1.27; Bottom Overlay "SCK" at 53.975,67.332 h1.27; Bottom Overlay "MOSI" at 54.737,64.792 h1.27; Bottom Overlay "MISO" at 54.991,62.252 h1.27; Bottom Overlay "RST" at 53.975,54.632 h1.27; Bottom Overlay "3.3V" at 54.991,52.092 h1.27; Bottom Overlay "IRQ" at 53.721,59.712 h1.27; Top Overlay "GND" at 50.546,57.172 h1.27; Top Overlay "RST" at 50.546,54.632 h1.27; Top Overlay "3.3V" at 50.546,52.092 h1.27; Top Overlay "SDA" at 50.546,69.872 h1.27; Top Overlay "SCK" at 50.546,67.332 h1.27; Top Overlay "MOSI" at 50.546,64.792 h1.27; Top Overlay "MISO" at 50.546,62.252 h1.27; Top Overlay "IRQ" at 50.546,59.712 h1.27